# Altium PCB Sensor_Box_IO_Relay.PCBDOC (part 2 of 2)
Units mm, origin at the board's own origin, x right, y up, seen from the top; angles counter-clockwise.
Board outline 45.25 x 73.05 mm, 2 copper layers (Top, Bot), stack 1.571 mm thick; 73 components, 71 nets, 243 pads, 88 vias.
Unrouted connection lines stored in the file: 1.
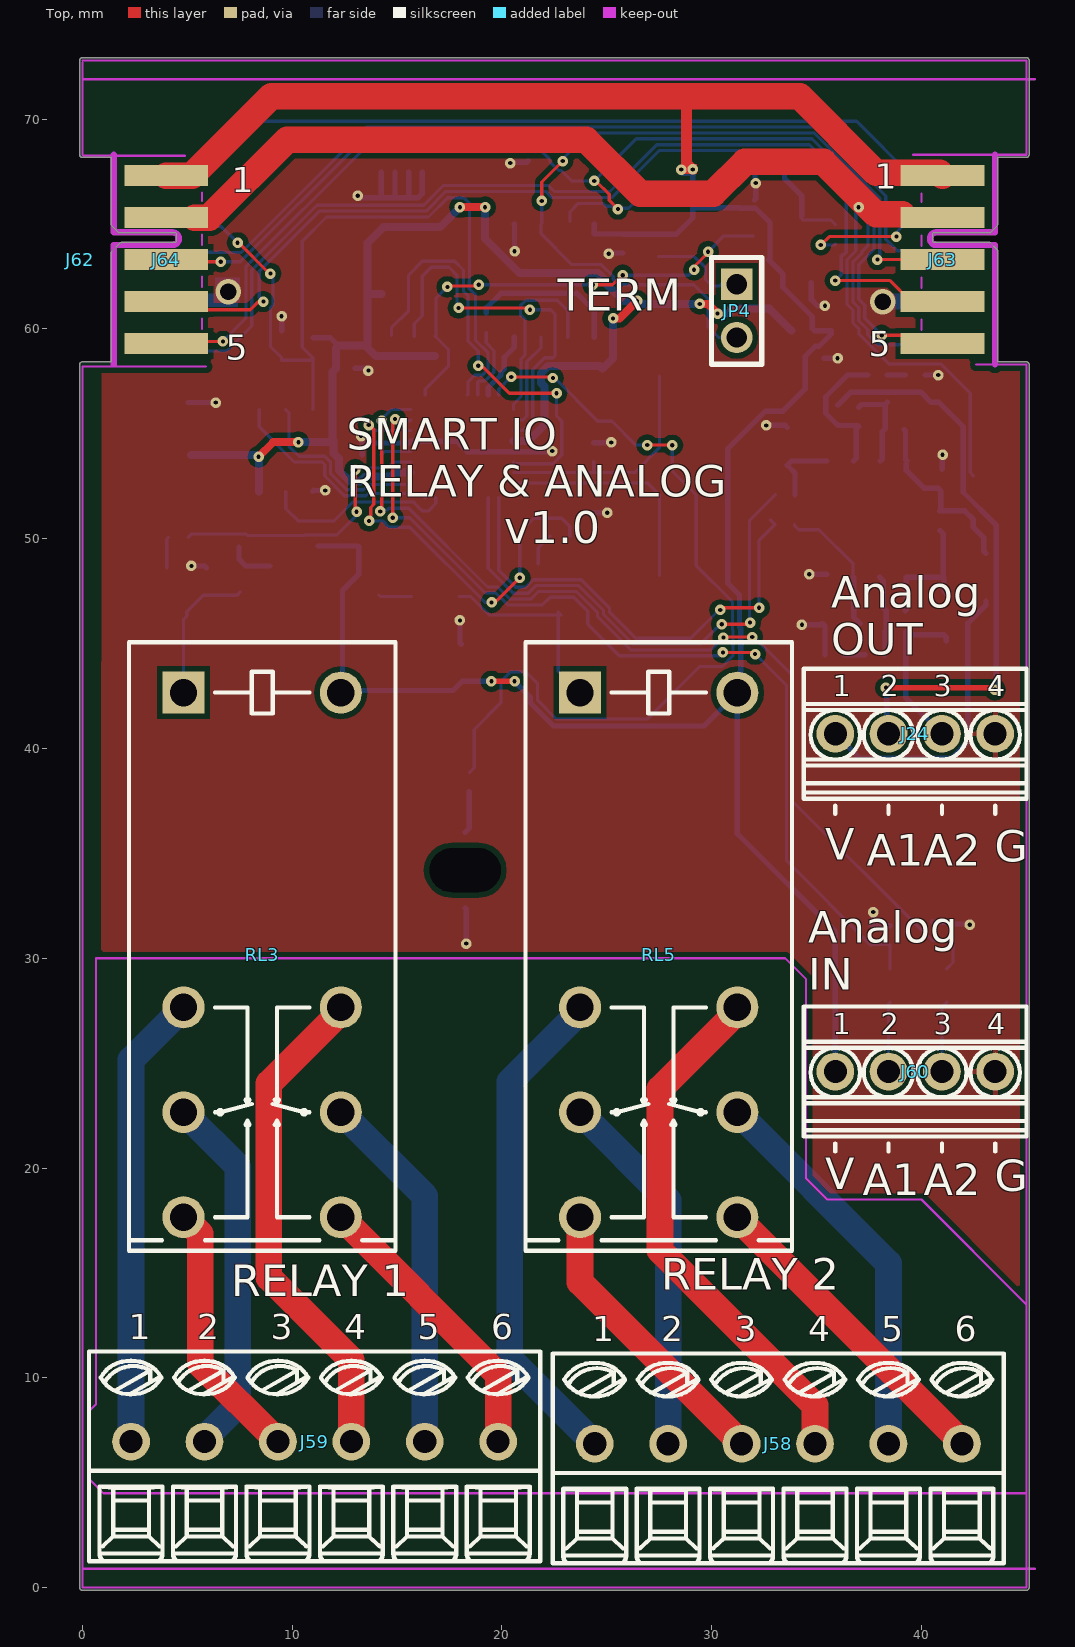
[diagram p0: Top view]

## Via types
v1: diameter 0.5, hole 0.2, Top to Bot, tented both sides, 86 vias
v2: diameter 1.2, hole 0.8, Top to Bot, tented both sides, 2 vias

## Nets (pads, with @x,y where several pads share a name; then routed paths per layer and width w, separated by ;. In a path a pad name is that pad's centre, name@x,y a point inside that pad or via, vN(x,y) a via of type N, cw(c..) or ccw(c..) an arc to the next point about the centre after c; other vN are vias at no path point) (continued)
P12V0: (continued)
  Bot w0.152: v1(37,65.8) 37,65.706 36.862,65.568 36.862,63.709 36.449,63.297 36.449,61.177 36.733,60.894 36.733,60.277 37.026,59.984 37.026,59.738 38.434,58.33 40.911,58.33 42.319,56.922 42.319,53.154 D43.2
PROG_MISO: IC63.16 J84.1 | length 10.6
  Bot w0.152: J84.1 8.43,55.33 10.107,53.653 11.434,53.653 11.553,53.534 11.553,52.986 12.491,52.049 13.519,52.049 13.619,52.149 16.282,52.149 16.35,52.081 IC63.16
PROG_MOSI: IC63.15 J84.4 | length 9.2
  Bot w0.152: J84.4 9.7,51.43 10.283,50.847 11.996,50.847 12.902,51.753 15.772,51.753 15.967,51.559 15.997,51.559 15.997,51.529 16.204,51.322 16.496,51.322 16.532,51.358 16.85,51.675 IC63.15
PROG_SCK: IC63.17 J84.3 | length 8.9
  Bot w0.152: J84.3 9.847,56.003 9.847,54.412 10.326,53.933 11.55,53.933 11.833,53.65 11.833,53.102 12.607,52.328 13.403,52.328 13.653,52.578 15.578,52.578 IC63.17
PWM1: IC63.10 R76.2 | length 24.8
  Top w0.152: v1(30.48,45.923) 31.75,45.923 v1(31.826,45.999)
  Bot w0.152: IC63.10 19.35,48.592 20.542,47.401 21.259,47.401 21.62,47.762 23.662,47.762 24.841,46.583 24.841,46.394 26.258,44.977 29.455,44.977 30.401,45.923 v1(30.48,45.923) ; v1(31.826,45.999) 31.805,46.021 31.805,50.875 R76.2
PWM2: IC63.9 R173.2 | length 22.8
  Top w0.152: v1(30.404,46.602) 30.507,46.704 v1(32.258,46.704)
  Bot w0.152: IC63.9 19.85,48.487 20.658,47.68 21.143,47.68 21.505,48.042 23.778,48.042 25.121,46.699 25.121,46.51 26.374,45.257 29,45.257 30.345,46.602 v1(30.404,46.602) ; v1(32.258,46.704) 32.258,49.916 R173.2 33.003,50.681 R173.2@32.789,50.894
REL1: IC63.22 R174.1 | length 21.6
  Top w0.152: v1(13.648,55.413) 13.648,55.47 13.894,55.224 13.894,51.635 13.747,51.488 13.747,51.112 ; v1(19.507,46.965) 19.685,46.965 v1(20.853,48.133)
  Bot w0.152: v1(13.648,55.413) 13.648,55.387 13.885,55.15 IC63.22 ; v1(13.665,50.847) 14.312,50.847 14.612,50.547 15.609,50.547 19.191,46.965 v1(19.507,46.965) ; v1@20.726,48.006 v1(20.853,48.133) 20.853,50.317 21.514,50.978 22.843,50.978 23.228,50.593 R174.1
REL2: IC63.19 R175.1 | length 13.6
  Top w0.152: v1(13.005,53.289) 13.005,51.35 v1(13.072,51.283)
  Bot w0.152: R175.1 5.209,50.226 7.782,50.226 7.858,50.15 10.596,50.15 10.625,50.178 12.137,50.178 13.072,51.113 v1(13.072,51.283) ; v1(13.005,53.289) 13.005,53.34 13.03,53.365 14.535,53.365 14.82,53.65 IC63.19
RESETn: D85.1 IC63.29 J64.7 J84.5 R218.2 | length 39.4
  Top w0.152: v1(7.4,64.1) 7.452,64.1 8.914,62.638 v1(8.966,62.638)
  Bot w0.152: J64.7 5.5,65.3 5.924,64.876 6.624,64.876 v1(7.4,64.1) ; v1(8.966,62.638) 9.083,62.521 9.083,61.112 8.966,60.996 8.966,59.159 9.5,58.625 D85.1 10.87,58.5 R218.2 ; J84.5 11,56.18 R218.2 ; IC63.29 18.387,56.887 18.387,57.482 18.694,57.789 19.06,57.789 19.333,58.062 19.333,58.17 19.339,58.176 19.339,58.854 18.74,59.453 18.74,61.619 18.447,61.912 18.447,62.288 18.453,62.294 18.453,65.988 18.188,66.253 17.422,66.253 16.501,65.333 11.637,65.333 10.487,64.182 10.487,59.123 10.98,58.63 R218.2
SCL1: IC63.6 IC70.6 R311.2 | length 21
  Top w0.152: v1(18.872,58.242) 19.044,58.242 20.358,56.928 v1(22.602,56.928)
  Bot w0.152: R311.2 14.732,60.046 15.554,60.867 IC70.6 15.554,62.569 16.205,63.221 17.755,63.221 18.167,62.808 18.167,61.797 18.387,61.577 18.387,59.411 18.872,58.926 v1(18.872,58.242) ; IC63.6 20.55,53.571 22.437,53.571 22.856,53.99 22.856,55.605 22.602,55.859 v1(22.602,56.928)
SDA1: IC63.3 IC70.5 R309.2 | length 18.2
  Top w0.152: v1(17.934,60.997) 21.249,60.997 v1(21.336,60.909)
  Bot w0.152: R309.2 15.824,60.249 16.204,60.628 IC70.5 16.204,62.508 16.637,62.941 17.475,62.941 17.853,62.563 17.853,61.084 17.934,61.004 v1(17.934,60.997) ; IC63.3 20.987,55.15 21.467,55.63 21.467,58.056 22.033,58.622 22.437,58.622 22.53,58.715 22.53,60.699 22.32,60.909 v1(21.336,60.909)
pads on no net: D48.2 D49.2 IC63.11 IC63.26 IC63.27 IC63.28 LD23.3

## Polygon pours and split planes (outlines as drawn)
GND on Bot "Signal Layer 1-No Net 1" (solid, remove dead copper, pour order 2): 45,72.5 45,-0.5 0.5,-0.5 -0.5,0.5 -0.5,73
GND on Top "Signal Layer 1-No Net 1" (solid, remove dead copper, pour order 0): 0.964,78.71 46.064,78.71 46.064,5.71 0.864,5.71

## Keep-outs
Top:
  lines w0.1: 0,0.9 33.7,0.9 ; 0,71.9 33.7,71.9 ; 11.7,0.9 45.4,0.9 ; 11.7,71.9 45.4,71.9 ; 0.323,5.177 1,4.5 45,4.5 45,13.5 40,18.5 35.5,18.5 34.5,19.5 34.5,29 33.5,30 14.923,30 0.66,30 0.66,8.756 0.323,8.419 0.323,5.177
Bot:
  lines w0.1: 0,2.65 33.35,2.65 ; 0,70.15 33.65,70.15 ; 11.7,2.65 45.05,2.65 ; 11.7,70.15 45.35,70.15 ; 0,5 0,28.5 1.5,30 33.5,30 34.5,29 34.5,22.8 35.8,21.5 36,21.5 45,12.5 45,5 44,4 1,4 0,5
KeepOutLayer:
  lines w0.1: 0,72.7 0,68.3 0.05,68.25 4.9,68.25 ; 0,72.8 45,72.8 ; 5.7,60 5.7,60.5 ; 5.7,62 5.7,62.5 ; 5.7,64 5.7,64.5 ; 5.7,66.1 5.7,66.5 ; 5.9,58.2 0,58.2 0,0 45,0 ; 39.6,68.3 45,68.3 45,72.8 ; 40,59.95 40,60.45 ; 40,61.95 40,62.45 ; 40,63.95 40,64.45 ; 40,66.05 40,66.45 ; 42.6,58.3 42.6,58.3 ; 42.6,58.3 45,58.3 45,0 ; 45,0 45,0 ; 45,72.8 45,72.8

## Other copper
Top:
  rectangle net P5V0: 28.524,67.386 29.286,67.869
Bot:
  rectangle net P5V0: 28.524,67.285 29.261,67.869
  rectangle net GND: 5.817,61.036 7.417,61.697
  rectangle net GND: 6.325,61.265 7.518,62.459

## Silkscreen, mask and mechanical layers (free items; w line width, h text height)
TopOverlay:
  text "TERM" at 22.657,60.858 h1.52
  text "SMART IO / RELAY & ANALOG" at 12.6,52 h1.5
  text "v1.0" at 20.117,49.784 h1.52
  text "Analog / OUT" at 35.7,44.461 h1.5
  text "V" at 35.4,34.7 h1.5
  text "G" at 43.5,34.6 h1.5
  text "A1" at 37.4,34.4 h1.5
  text "A2" at 40.1,34.4 h1.5
  text "Analog  / IN" at 34.6,28.5 h1.5
  text "V" at 35.4,19 h1.5
  text "G" at 43.5,18.9 h1.5
  text "A1" at 37.2,18.7 h1.5
  text "A2" at 40.1,18.7 h1.5
  text "RELAY 2" at 27.6,14.2 h1.5
  text "RELAY 1" at 7.1,13.9 h1.5
Mechanical1:
  lines w0.254: 22.5,0 45,0 ; 0,58.3 0,0 45,0 ; 0,58.3 1.5,58.3 ; 0,58.3 1.5,58.3 ; 1.5,58.3 1.5,63.6 1.9,64 4.6,64 4.6,64.7 1.8,64.7 1.5,65 1.5,68.3 0,68.3 0,72.8 45,72.8 45,68.3 43.5,68.3 43.5,65 43.2,64.7 40.4,64.7 40.4,64 43.2,64 43.4,63.8 43.5,63.7 43.5,58.3 45,58.3 ; 45,0 45,58.3 ; 45,58.3 45,58.3

## Text inside footprints (layer, text, board x,y; h text height)
J24: TopOverlay "3" at 40.589,42.478 h1; TopOverlay "2" at 38.049,42.478 h1; TopOverlay "1" at 35.763,42.478 h1; TopOverlay "4" at 43.129,42.478 h1
J58: TopOverlay "3" at 31.089,11.736 h1.2; TopOverlay "4" at 34.59,11.736 h1.2; TopOverlay "2" at 27.59,11.736 h1.2; TopOverlay "5" at 38.09,11.736 h1.2; TopOverlay "1" at 24.304,11.736 h1.2; TopOverlay "6" at 41.59,11.736 h1.2; Mechanical14 "3" at 31.089,11.736 h1.2; Mechanical14 "4" at 34.59,11.736 h1.2; Mechanical14 "2" at 27.59,11.736 h1.2; Mechanical14 "5" at 38.09,11.736 h1.2; Mechanical14 "1" at 24.304,11.736 h1.2; Mechanical14 "6" at 41.59,11.736 h1.2
J59: TopOverlay "3" at 8.989,11.836 h1.2; TopOverlay "4" at 12.49,11.836 h1.2; TopOverlay "2" at 5.49,11.836 h1.2; TopOverlay "5" at 15.99,11.836 h1.2; TopOverlay "1" at 2.204,11.836 h1.2; TopOverlay "6" at 19.49,11.836 h1.2; Mechanical14 "3" at 8.989,11.836 h1.2; Mechanical14 "4" at 12.49,11.836 h1.2; Mechanical14 "2" at 5.49,11.836 h1.2; Mechanical14 "5" at 15.99,11.836 h1.2; Mechanical14 "1" at 2.204,11.836 h1.2; Mechanical14 "6" at 19.49,11.836 h1.2
J60: TopOverlay "3" at 40.589,26.378 h1; TopOverlay "2" at 38.049,26.378 h1; TopOverlay "1" at 35.763,26.378 h1; TopOverlay "4" at 43.129,26.378 h1
J63: TopOverlay "5" at 37.475,58.7 h1.2; TopOverlay "1" at 37.775,66.68 h1.2; BottomOverlay "10" at 36.6,59.9 h1.2 r180; BottomOverlay "6" at 37.65,67.88 h1.2 r180
J64: TopOverlay "1" at 7.125,66.5 h1.2; TopOverlay "5" at 6.825,58.52 h1.2; BottomOverlay "6" at 7.25,67.7 h1.2 r180; BottomOverlay "10" at 6.95,59.72 h1.2 r180